# Altium PCB pyTrainer_BASIC_V3.pcbdoc
Units mil, origin at the board's own origin, x right, y up, seen from the top; angles counter-clockwise.
Board outline 6296.33 x 3398.12 mil, 2 copper layers (Top Layer, Bottom Layer); 28 components, 27 nets, 93 pads, 0 vias.
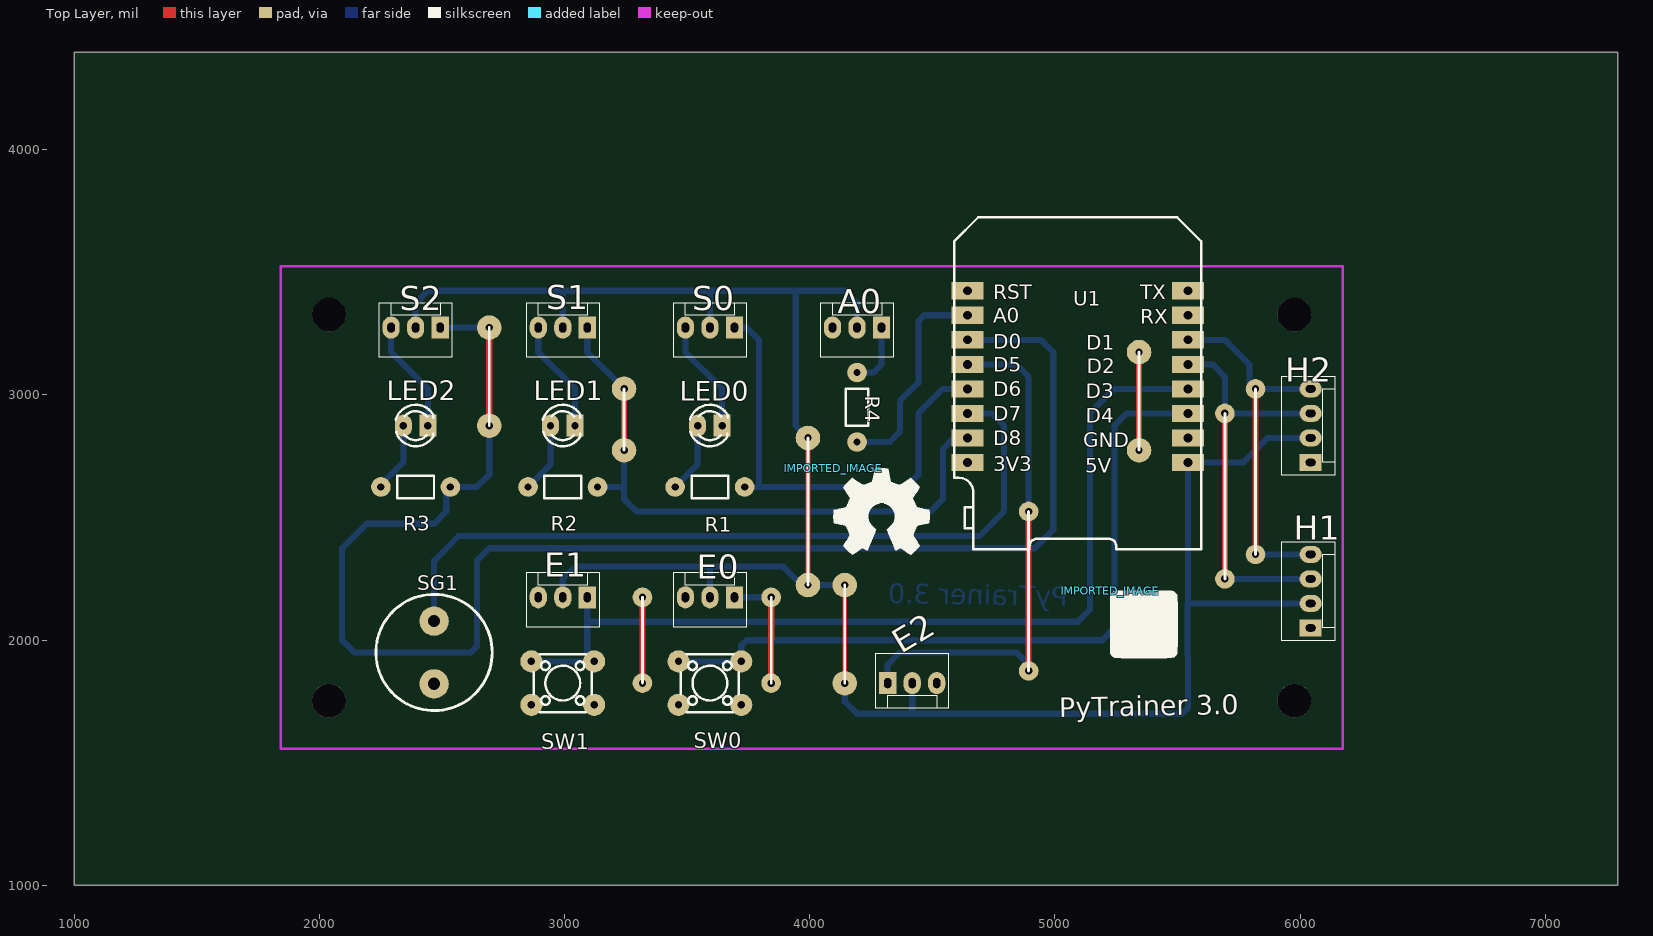
[diagram p0: Top Layer view]
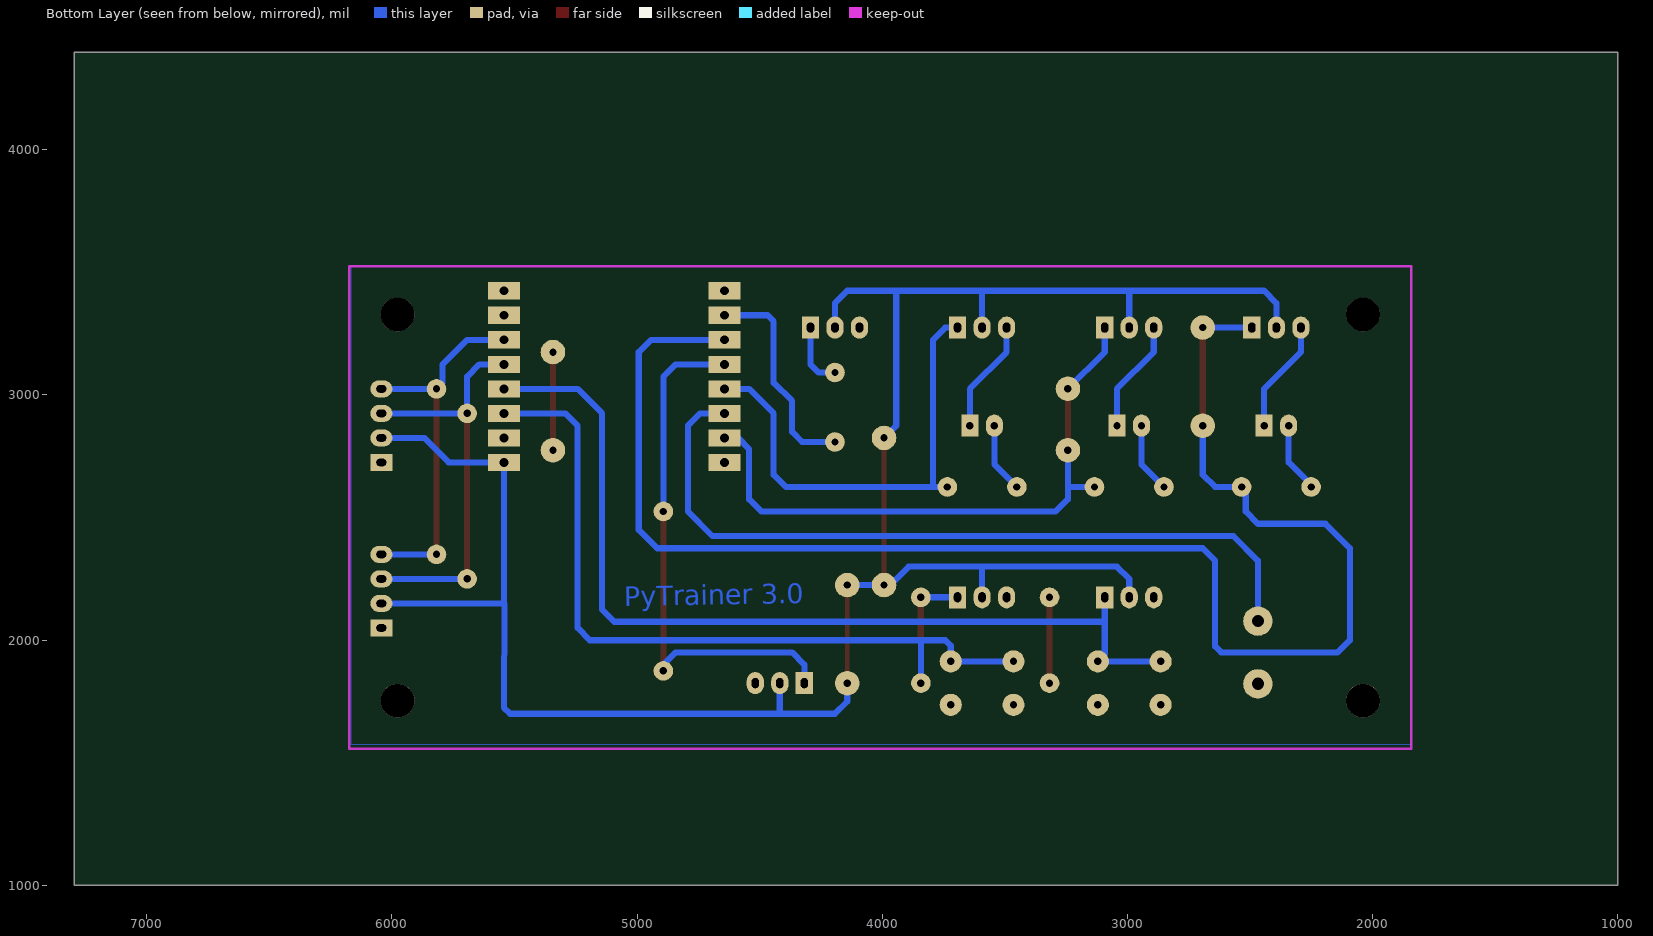
[diagram p1: Bottom Layer view, seen from below]

## Layer stack, top to bottom
Top Layer: signal copper (thickness not stored)
Dielectric: dielectric 12.6, FR-4, Dk 4.8
Bottom Layer: signal copper (thickness not stored)

## Board outline
7296.33,1000 1000,1000 1000,4398.12 7296.33,4398.12

## Components (designator, comment, footprint, x,y, rotation, side; value= is the part's Value field where it differs from the comment)
A0 "Header-Female-2.54_1x3" MOLEX-1X3 4293.14,3274.52 r180 top
E0 "Header-Female-2.54_1x3" MOLEX-1X3 3693.14,2174.52 r180 top
E1 "Header-Female-2.54_1x3" MOLEX-1X3 3093.14,2174.52 r180 top
E2 "Header-Female-2.54_1x3" MOLEX-1X3 4318.14,1824.52 r0 top
H1 "Header-Male-2.54_1x4_C124378" MOLEX-1X4 6043.14,2049.52 r90 top
H2 "Header-Male-2.54_1x4_C124378" MOLEX-1X4 6043.14,2724.52 r90 top
IMPORTED_IMAGE "IMPORTED_IMAGE" IMPORTED_IMAGE 4097.06,2700.65 r0 top
IMPORTED_IMAGE "IMPORTED_IMAGE" IMPORTED_IMAGE 5225.06,2201.48 r0 top
LED0 "LED-0603_R" LED-TH_BD3.0-P2.54-FD 3593.14,2874.52 r0 top
LED1 "LED-0603_R" LED-TH_BD3.0-P2.54-FD 2993.14,2874.52 r0 top
LED2 "LED-0603_R" LED-TH_BD3.0-P2.54-FD 2393.14,2874.52 r0 top
R1 "220" RD-3.2X1.8-1/8W 3593.14,2624.52 r0 top
R2 "220" RD-3.2X1.8-1/8W 2993.14,2624.52 r0 top
R3 "220" RD-3.2X1.8-1/8W 2393.14,2624.52 r0 top
R4 "180K" RD-3.2X1.8-1/8W 4193.14,2949.52 r270 top
S0 "Header-Female-2.54_1x3" MOLEX-1X3 3693.14,3274.52 r180 top
S1 "Header-Female-2.54_1x3" MOLEX-1X3 3093.14,3274.52 r180 top
S2 "Header-Female-2.54_1x3" MOLEX-1X3 2493.14,3274.52 r180 top
SG1 "BUZZER" BUZZER-12MM-NS 2468.14,1949.52 r90 top
SW0 "Switch-6x6x7.3-square-head" SW-TH_4P-L6.0-W6.0-P4.50-LS6.5 3593.14,1824.52 r0 top
SW1 "Switch-6x6x7.3-square-head" SW-TH_4P-L6.0-W6.0-P4.50-LS6.5 2993.14,1824.52 r0 top
U1 "WEMOS D1 MINI" "WEMOS D1 MINI" 4643.14,2724.52 r90 top
? "" ? 1672.57,2540.27 r0 top
? "" ? 6418.74,3187.01 r0 top
? "" ? 6351.63,1887 r0 top
? "" ? 4008.49,3700.48 r0 top
? "" ? 1828.32,2540.27 r0 top
? "" ? 4008.49,3534.34 r0 top

## Footprints (in the part's own frame and the unit in brackets; to place one, negate y for a bottom-side part, rotate by r counter-clockwise, add the part's x,y. Pads: shape width x height; smd on the part's side, far side on the other; paste and mask are expansions set on the pad)
BUZZER-12MM-NS [mil]
  round 120 hole 50 paste+0 mask+4: +(128,0) -(-128,0)
IMPORTED_IMAGE [mil]
  silkscreen extent 0,-352 392,0
LED-TH_BD3.0-P2.54-FD [mil]
  oval 70x90 hole 30 paste+0 mask+2: 1(-50,0)
  rect 70x90 hole 30 paste+0 mask+2: 2(50,0)
  silkscreen extent -81,-84 72,85
MOLEX-1X3 [mil]
  rect 70x90 hole 30 slot 40.2 at 90 deg paste+0 mask+2: 1(0,0)
  oval 70x90 hole 30 slot 40.2 at 90 deg paste+0 mask+2: 2(100,0) 3(200,0)
  silkscreen extent -50,-100 250,120
MOLEX-1X4 [mil]
  rect 70x90 hole 30 slot 40.2 at 90 deg paste+0 mask+2: 1(0,0)
  oval 70x90 hole 30 slot 40.2 at 90 deg paste+0 mask+2: 2(100,0) 3(200,0) 4(300,0)
  silkscreen extent -50,-100 350,120
RD-3.2X1.8-1/8W [mil]
  round 80 hole 30 paste+0 mask+4: 1(-141.73,0) 2(141.73,0)
  silkscreen extent -75,-45 75,45
SW-TH_4P-L6.0-W6.0-P4.50-LS6.5 [mil]
  round 90 hole 30 paste+0 mask+2: 1(-127.95,88.58) 2(127.95,88.58) 3(-127.95,-88.58) 4(127.95,-88.58)
  silkscreen extent -118,-118 118,118
"WEMOS D1 MINI" [mil]
  rect 70x130 hole 36 paste+0 mask+4: 1(0,-900) 2(100,-900) 3(200,-900) 4(300,-900) 5(400,-900) 6(500,-900) 7(600,-900) 8(700,-900) 9(700,0) 10(600,0) 11(500,0) 12(400,0) 13(300,0) 14(200,0) 15(100,0) 16(0,0)
  silkscreen extent -354,-954 1000,54
? [mil]

## Free pads (board coordinates)
  round 137.8 hole 137.8 unplated paste+0: ""(2039.99,1752.87) ""(2039.99,3327.67) ""(5976.99,1752.87) ""(5976.99,3327.67)
  round 100 hole 30 paste+4 mask+4: ""(2693.14,2874.52) ""(2693.14,3274.52) ""(3243.14,2774.52) ""(3243.14,3024.52) ""(3993.14,2224.52) ""(3993.14,2824.52) ""(4143.14,1824.52) ""(4143.14,2224.52) ""(5343.14,2774.52) ""(5343.14,3174.52)
  round 80 hole 30 paste+4 mask+4: ""(3318.14,1824.52) ""(3318.14,2174.52) ""(3842.62,1824.52) ""(3843.14,2174.52) ""(4893.14,1874.52) ""(4893.14,2524.52) ""(5693.14,2249.52) ""(5693.14,2924.52) ""(5818.14,2349.52) ""(5818.14,3024.52)

## Nets (pads, with @x,y where several pads share a name; then routed paths per layer and width w, separated by ;. In a path a pad name is that pad's centre, name@x,y a point inside that pad or via, vN(x,y) a via of type N, cw(c..) or ccw(c..) an arc to the next point about the centre after c; other vN are vias at no path point)
+5V: A0.2 E0.2 E1.2 E2.2 H1.2 H2.2 pad.@3993.14,2224.52 pad.@3993.14,2824.52 pad.@4143.14,1824.52 pad.@4143.14,2224.52 S0.2 S1.2 S2.2 U1.1 | length 9061.4
  Top Layer w20: pad.@3993.14,2224.52 pad.@3993.14,2824.52 ; pad.@4143.14,1824.52 pad.@4143.14,2224.52
  Bottom Layer w25: S2.2 2393.14,3374.52 2443.14,3424.52 3043.14,3424.52 ; E1.2 2993.14,2249.52 3043.14,2299.52 3593.14,2299.52 ; S1.2 2993.14,3424.52 4143.14,3424.52 4193.14,3374.52 A0.2 ; E0.2 3593.14,2299.52 ; S0.2 3593.14,3424.52 ; 3943.14,3424.52 3943.14,2874.52 pad.@3993.14,2824.52 ; pad.@4143.14,1824.52 4143.14,1749.52 4193.14,1699.52 5518.14,1699.52 5543.14,1724.52 5541.24,2149.52 ; pad.@4143.14,2224.52 3993.14,2224.52 3968.14,2224.52 3893.14,2299.52 3593.14,2299.52 ; 4418.14,1699.52 E2.2 ; U1.1@5543.14,2699.52 5543.14,2649.52 5543.14,2599.52 5543.14,2149.52 H1.2 ; U1.1 5768.14,2724.52 5868.14,2824.52 H2.2
A0: R4.2 U1.10 | length 884
  Bottom Layer w25: R4.2 4326.44,2807.82 4368.14,2849.52 4368.14,2975.42 4443.14,3049.52 4443.14,3299.52 4468.14,3324.52 U1.10
BUZZER: SG1.+ U1.14 | length 3175.6
  Bottom Layer w25: SG1.+ 2468.14,2324.52 2568.14,2424.52 2893.14,2424.52 4693.14,2424.52 4793.14,2524.52 4793.14,2874.52 4743.14,2924.52 U1.14
GND: A0.3 E0.3 E1.3 E2.3 H1.1 H2.1 LED0.2 LED1.2 LED2.2 pad.@3318.14,1824.52 pad.@3318.14,2174.52 pad.@5343.14,2774.52 pad.@5343.14,3174.52 S0.3 S1.3 S2.3 SG1.- SW0.3 SW0.4 SW1.3 SW1.4 U1.2 | length 2136.4
  Top Layer w25: pad.@3318.14,1824.52 pad.@3318.14,2174.52 ; pad.@5343.14,2774.52 pad.@5343.14,3174.52
  Bottom Layer w25: S2.3 2293.14,3174.52 2443.14,3024.52 LED2.2 ; S1.3 2893.14,3174.52 3043.14,3024.52 LED1.2 ; S0.3 3493.14,3174.52 3643.14,3024.52 LED0.2
IN0: E1.1 SW1.1 SW1.2 U1.4 | length 3841
  Bottom Layer w25: SW1.1 SW1.2 3093.14,1941.05 3093.14,2074.52 ; E1.1 3093.14,2074.52 ; U1.4 5243.14,3024.52 5143.14,2924.52 5143.14,2224.52 5143.14,2124.52 5093.14,2074.52 3093.14,2074.52
IN1: E0.1 pad.@3842.62,1824.52 pad.@3843.14,2174.52 SW0.1 SW0.2 U1.3 | length 3692.9
  Top Layer w25: pad.@3842.64,1824.52 pad.@3843.14,2174.52
  Bottom Layer w25: SW0.1 SW0.2 3721.09,1977.47 3743.14,1999.52 5193.14,1999.52 5243.14,2049.52 5243.14,2874.52 5293.14,2924.52 U1.3 ; E0.1 pad.@3843.14,2174.52 ; pad.@3842.62,1824.52 3842.62,1999.52
IN2: E2.1 pad.@4893.14,1874.52 pad.@4893.14,2524.52 U1.12 | length 2187.1
  Top Layer w25: pad.@4893.14,1874.52 pad.@4893.14,2524.52
  Bottom Layer w25: E2.1 4318.14,1899.52 4368.14,1949.52 4843.14,1949.52 4893.14,1899.52 pad.@4893.14,1874.52 ; U1.12 4843.14,3124.52 4893.14,3074.52 pad.@4893.14,2524.52
OUT0: R1.2 S0.1 U1.13 | length 1941.1
  Bottom Layer w25: S0.1 3743.14,3274.52 3793.14,3224.52 3793.14,2624.52 ; R1.2 4393.14,2624.52 4443.14,2674.52 4443.14,2924.52 4543.14,3024.52 U1.13
OUT1: pad.@3243.14,2774.52 pad.@3243.14,3024.52 R2.2 S1.1 U1.15 | length 2585.2
  Top Layer w25: pad.@3243.14,2774.52 pad.@3243.14,3024.52
  Bottom Layer w25: S1.1 3093.14,3174.52 pad.@3243.14,3024.52 ; R2.2 3243.14,2624.52 ; pad.@3243.14,2774.52 3243.14,2574.52 3293.14,2524.52 4493.14,2524.52 4543.14,2574.52 4543.14,2779.12 4588.54,2824.52 U1.15@4693.14,2824.52
OUT2: pad.@2693.14,2874.52 pad.@2693.14,3274.52 R3.2 S2.1 U1.11 | length 6372
  Top Layer w25: pad.@2693.14,2874.52 pad.@2693.14,3269.94
  Bottom Layer w25: S2.1 pad.@2693.14,3274.52 ; pad.@2693.14,2874.52 2693.14,2674.52 2643.14,2624.52 R3.2 2518.14,2607.82 2518.14,2524.52 2468.14,2474.52 2193.14,2474.52 2093.14,2374.52 2093.14,1999.52 2143.14,1949.52 2618.14,1949.52 2643.14,1974.52 2643.14,2324.52 2693.14,2374.52 3693.14,2374.52 3793.14,2374.52 4918.14,2374.52 4993.14,2449.52 4993.14,3174.52 4943.14,3224.52 U1.11
R1_1: LED0.1 R1.1 | length 288
  Bottom Layer w25: R1.1 3543.14,2716.25 LED0.1
R2_1: LED1.1 R2.1 | length 288
  Bottom Layer w25: R2.1 2943.14,2716.25 LED1.1
R3_1: LED2.1 R3.1 | length 288
  Bottom Layer w25: R3.1 2251.41,2632.79 2343.14,2724.52 LED2.1
R4_1: A0.1 R4.1 | length 263.8
  Bottom Layer w25: R4.1 4259.87,3091.25 4293.14,3124.52 A0.1
S$576: 
S$5805: 
S$5809: 
S$5813: 
S$5817: 
S$5821: 
S$5825: 
S$5829: 
S$5833: 
S$5837: 
S$6433: 
SCL: H1.4 H2.4 pad.@5818.14,2349.52 pad.@5818.14,3024.52 U1.6 | length 1526.8
  Top Layer w25: pad.@5818.14,2349.52 pad.@5818.14,3024.52
  Bottom Layer w25: U1.6 5693.14,3224.52 5793.14,3124.52 5793.14,3049.52 5818.14,3024.52 5869.14,3024.52 H2.4 ; pad.@5818.14,2349.52 H1.4
SDA: H1.3 H2.3 pad.@5693.14,2249.52 pad.@5693.14,2924.52 U1.5 | length 1695.7
  Top Layer w25: pad.@5693.14,2249.52 pad.@5693.14,2924.52
  Bottom Layer w25: U1.5 5643.14,3124.52 5693.14,3074.52 5693.14,2949.52 5693.14,2924.52 5917.15,2924.52 H2.3 ; pad.@5693.14,2249.52 H1.3
pads on no net: U1.7 U1.8 U1.9 U1.16

## Polygon pours and split planes (outlines as drawn)
GND on Bottom Layer (solid): 1843.14,3524.52 5793.14,3524.52 6168.14,3524.52 6168.14,2549.52 6168.14,2074.52 6168.14,1574.52 1843.14,1574.52 1843.14,3524.52 1893.14,3524.52

## Other copper
Bottom Layer:
  text "PyTrainer 3.0" at 5053.46,2138.86 h80 r359

## Silkscreen, mask and mechanical layers (free items; w line width, h text height)
Top Overlay:
  circle w11.81: c2468.14,1949.52 r237.17
  lines w11.81 net S$5805: 4893.14,1874.52 4893.14,2524.52
  lines w11.81 net S$5809: 3993.14,2224.52 3993.14,2824.52
  lines w11.81 net S$5813: 4143.14,1824.52 4143.14,2224.52
  lines w11.81 net S$5817: 3843.14,1824.52 3843.14,2174.52
  lines w11.81 net S$5821: 3318.14,1824.52 3318.14,2174.52
  lines w11.81 net S$5825: 3243.14,2774.52 3243.14,3024.52
  lines w11.81 net S$5829: 2693.14,2874.52 2693.14,3274.52
  lines w11.81 net S$5833: 5693.14,2249.52 5693.14,2924.52
  lines w11.81 net S$5837: 5818.14,2349.52 5818.14,3024.52
  lines w11.81 net S$6433: 5343.14,2774.52 5343.14,3174.52
  text "PyTrainer 3.0" at 5018.84,1684.53 h80 r1

## Text inside footprints (layer, text, board x,y; h text height)
SG1: Document "+" at 2405.46,2072.2 h50 r225
U1: Top Overlay "RST" at 4748.15,3389.15 h59.05; Top Overlay "A0" at 4748.14,3294.15 h59.05; Top Overlay "D0" at 4748.14,3189.15 h59.05; Top Overlay "D5" at 4748.14,3094.15 h59.05; Top Overlay "D6" at 4748.15,2994.15 h59.05; Top Overlay "D7" at 4748.14,2894.15 h59.05; Top Overlay "D8" at 4748.14,2794.15 h59.05; Top Overlay "3V3" at 4748.15,2689.15 h59.05; Top Overlay "TX" at 5348.15,3389.15 h59.05; Top Overlay "RX" at 5348.15,3289.15 h59.05; Top Overlay "D1" at 5127.6,3184.7 h59.05; Top Overlay "D2" at 5129.44,3088.69 h59.05; Top Overlay "D3" at 5126.3,2986 h59.05; Top Overlay "D4" at 5126.29,2886.84 h59.05; Top Overlay "GND" at 5116.3,2786 h59.05; Top Overlay "5V" at 5124.44,2682.85 h59.05